# Altium PCB PiModulos V2.PcbDoc
Units mil, origin at the board's own origin, x right, y up, seen from the top; angles counter-clockwise.
Board outline 2605 x 1245 mil, 2 copper layers (Top Layer, Bottom Layer); 57 components, 38 nets, 130 pads, 0 vias.
Unrouted connection lines stored in the file: 90.
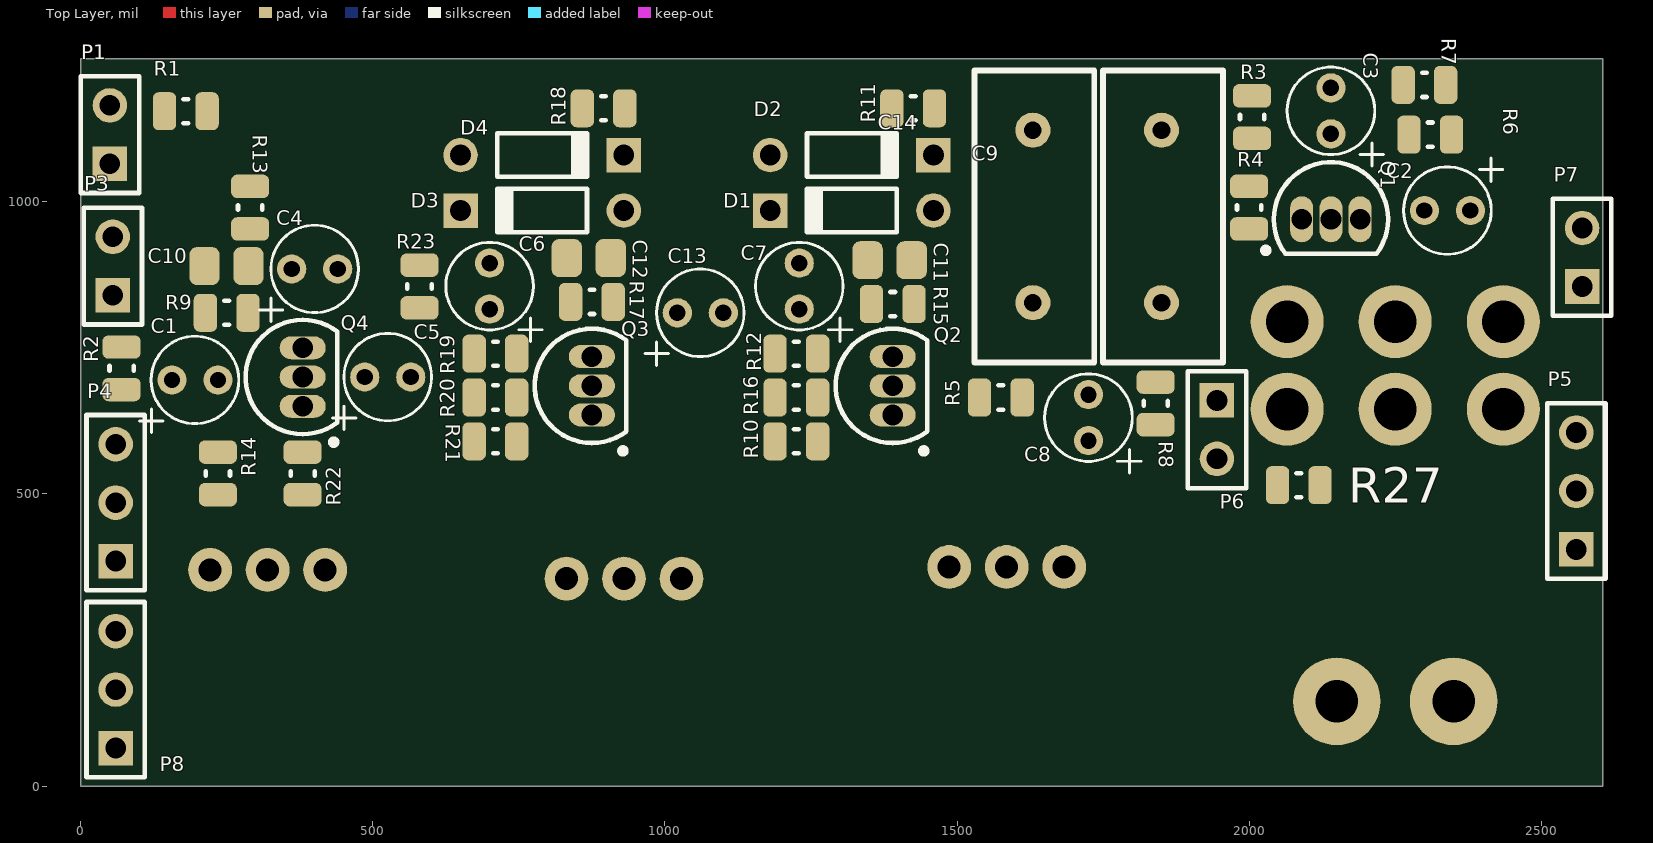
[diagram p0: Top Layer view]
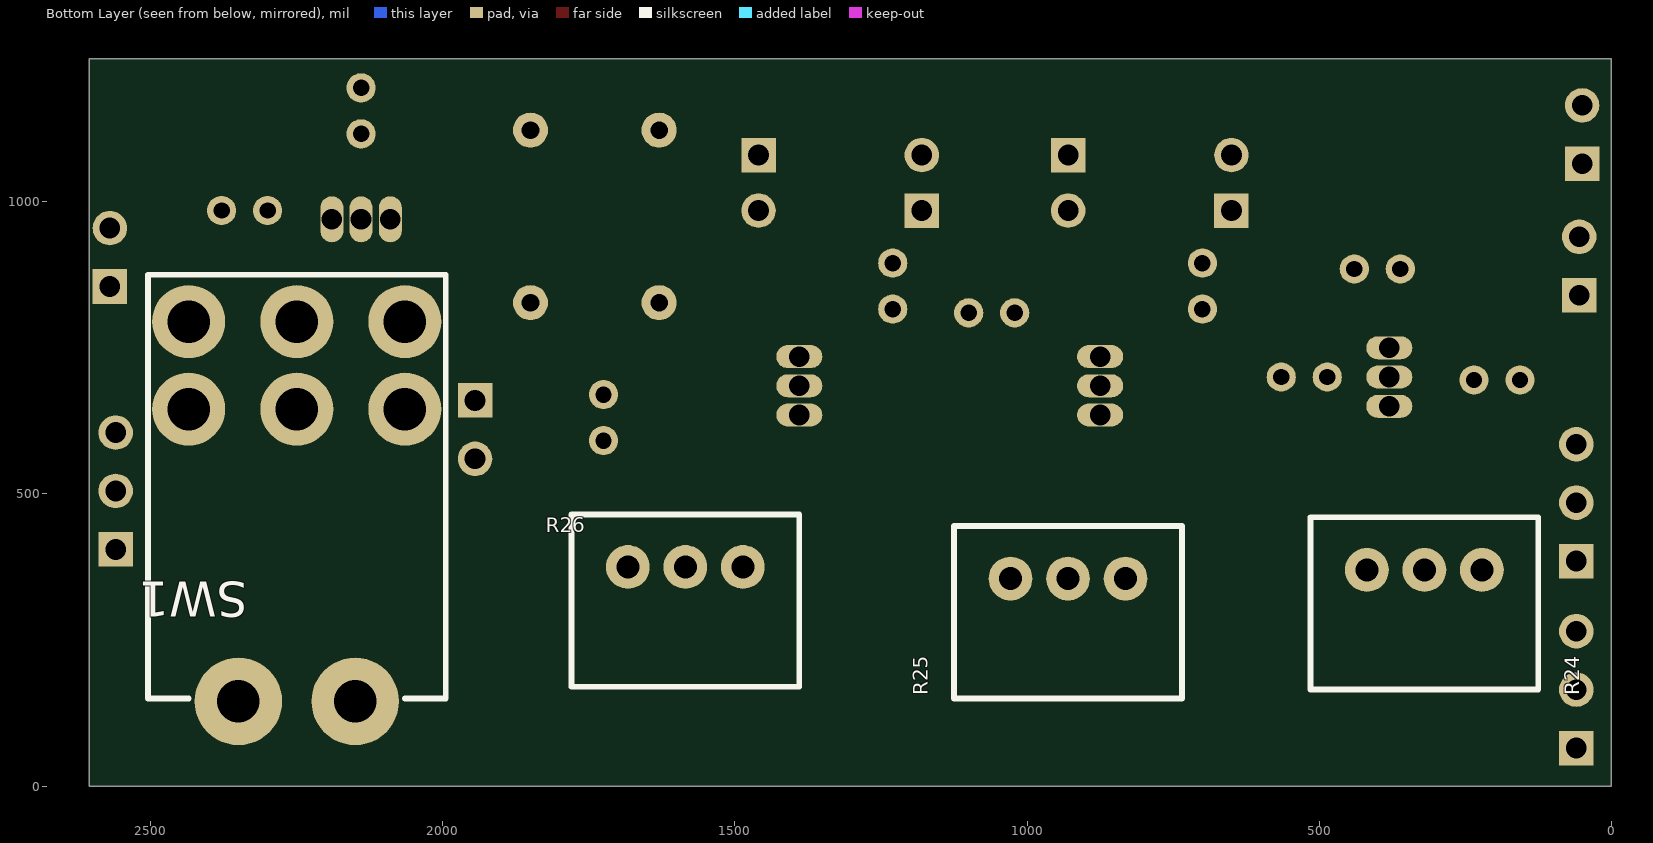
[diagram p1: Bottom Layer view, seen from below]

## Layer stack, top to bottom
Top Solder: solder mask 0.4, Solder Resist, Dk 3.5
Top Layer: signal copper 1.4
Dielectric 1: dielectric 12.6, FR-4, Dk 4.8
Bottom Layer: signal copper 1.4
Bottom Solder: solder mask 0.4, Solder Resist, Dk 3.5

## Board outline
0,0 2605,0 2605,1245 0,1245

## Design rules (kind name [scope] priority, off if disabled: settings)
Clearance [All] p1: gap=10
Height [All] p1: minheight=0 maxheight=6000 prefheight=500
PolygonConnect [All] p1: connectstyle=Relief reliefconductorwidth=10 reliefentries=4 polygonreliefangle="90 Angle" airgapwidth=10
RoutingVias [All] p1: holewidth=28 width=50 viastyle="Through Hole" minholewidth=28 minwidth=50 maxholewidth=28 maxwidth=50
SolderMaskExpansion [All] p1: expansion=4
Width [All] p1: maxlimit=10 minlimit=10 preferedwidth=10
29 further rules are at their usual default settings.

## Components (designator, comment, footprint, x,y, rotation, side; value= is the part's Value field where it differs from the comment)
C1 "0.1uF" 5X12.5mmCAP 235,695 r180 top
C2 "0.1uF" 5X12.5mmCAP 2300,985 r0 top
C3 "0.1uF" 5X12.5mmCAP 2140,1195 r270 top
C4 "0.1uF" 5X12.5mmCAP 440,885 r180 top
C5 "0.1uF" 5X12.5mmCAP 565,700 r180 top
C6 "0.1uF" 5X12.5mmCAP 700,895 r270 top
C7 "0.1uF" 5X12.5mmCAP 1230,895 r270 top
C8 "0.1uF" 5X12.5mmCAP 1725,670 r270 top
C9 "4700pF" VY2472M49Y5US63V7 1850,975 r90 top
C10 "560pF" C0805 250,890 r180 top
C11 "560pF" C0805 1385,900 r180 top
C12 "560pF" C0805 870,903.58 r180 top
C13 "0.1uF" 5X12.5mmCAP 1100,810 r180 top
C14 "4700pF" VY2472M49Y5US63V7 1630,975 r90 top
D1 "1N914BTR" DO-35 1320,985 r180 top
D2 "1N914BTR" DO-35 1320,1080 r0 top
D3 "1N914BTR" DO-35 790,985 r180 top
D4 "1N914BTR" DO-35 790,1080 r0 top
P1 "Header 2" HDR1X2 50,1065 r90 top
P3 "Header 2" HDR1X2 55,840 r90 top
P4 "Header 3" HDR1X3 60,385 r90 top
P5 "Header 3" HDR1X3 2560,405 r90 top
P6 "Header 2" HDR1X2 1945,660 r270 top
P7 "Header 2" HDR1X2 2570,855 r90 top
P8 "Header 3" HDR1X3 60,65 r90 top
Q1 "2N3904" TO-92A 2140,970 r270 top
Q2 "2N3904" TO-92A 1390,685 r0 top
Q3 "2N3904" TO-92A 875,685 r0 top
Q4 "2N3904" TO-92A 380,700 r0 top
R1 "1.2K" R0805 180,1155 r0 top
R2 "33K" R0805 70,715 r270 top
R3 "100K" R0805 2005,1145 r270 top
R4 "2.7K" R0805 2000,990 r90 top
R5 "33K" R0805 1575,665 r180 top
R6 "10K" R0805 2310,1115 r0 top
R7 "390K" R0805 2300,1200 r0 top
R8 "33K" R0805 1840,655 r90 top
R9 "470K" R0805 250,810 r180 top
R10 "100r" R0805 1225,590 r0 top
R11 "18K" R0805 1425,1160 r0 top
R12 "8.2K" R0805 1225,740 r180 top
R13 "18K" R0805 290,990 r270 top
R14 "100K" R0805 235,535 r90 top
R15 "470K" R0805 1390,825 r180 top
R16 "100K" R0805 1225,665 r0 top
R17 "470K" R0805 875,828.58 r180 top
R18 "10K" R0805 895,1160 r180 top
R19 "8.2K" R0805 710,740 r180 top
R20 "100K" R0805 710,665 r0 top
R21 "100r" R0805 710,590 r0 top
R22 "100r" R0805 380,535 r90 top
R23 "1.2K" R0805 580,855 r90 top
R24 "100K" BOURNS_PTD90SERIES_POT 320,370 r0 bottom
R25 "100K" BOURNS_PTD90SERIES_POT 930,355 r0 bottom
R26 "100K" BOURNS_PTD90SERIES_POT 1585,375 r0 bottom
R27 "150K" R0805 2085,515 r180 top
SW1 "100DP1T2B4M6QE" 100DP1T2B4M6QE 2250,645 r0 bottom

## Footprints (in the part's own frame and the unit in brackets; to place one, negate y for a bottom-side part, rotate by r counter-clockwise, add the part's x,y. Pads: shape width x height; smd on the part's side, far side on the other; paste and mask are expansions set on the pad)
5X12.5mmCAP [mil]
  round 50 hole 28: 1(0,0) 2(78.74,0)
  silkscreen extent -36,-75 134,90, body extent -35,-75 115,75, height 492
100DP1T2B4M6QE [mm] "100DP1T2B4M6QE DPDT Toggle Switch"
  round 3.81 hole 1.85: 0(-2.54,12.7) 0(2.54,12.7)
  round 3.175 hole 1.85: 1(-4.7,0) 2(0,0) 3(4.7,0) 4(-4.7,-3.81) 5(0,-3.81) 6(4.7,-3.81)
  silkscreen extent -6.48,-5.84 6.48,12.57, body extent -6.35,-4.44 6.35,26.83, height 11.56
BOURNS_PTD90SERIES_POT [mm] "Bourns Inc PTD90 Series Potentiometers, throughhole right angle PCB MOunted"
  round 1.905 hole 1: 1(-2.5,0) 2(0,0) 3(2.5,0)
  silkscreen extent -4.95,-2.29 4.95,5.21, body extent -4.8,-2.13 4.8,20.02, height 11.2
C0805 [mil]
  rrect50% 52x65 smd: 1(-37.4,0) 2(38,0)
  body extent -40,-30 40,30, height 35
DO-35 [mm] "Diode, Axial; Body 3.8 x 1.9 mm (LxDia. max), Lead Dia. 0.53 mm (max)"
  round 1.5 hole 0.9: 1(-3.55,0)
  rect 1.5x1.5 hole 0.9: 2(3.55,0)
  silkscreen extent -1.95,-0.95 2.05,0.95
HDR1X2 [mm] "Connector; Header; 2 Position"
  rect 1.5x1.5 hole 0.9: 1(0,0)
  round 1.5 hole 0.9: 2(2.54,0)
  silkscreen extent -1.27,-1.27 3.81,1.27
HDR1X3 [mm] "Connector; Header; 3 Position"
  rect 1.5x1.5 hole 0.9: 1(0,0)
  round 1.5 hole 0.9: 2(2.54,0) 3(5.08,0)
  silkscreen extent -1.27,-1.27 6.35,1.27
R0805 [mil]
  rrect50% 40x65 smd: 1(-36.42,0) 2(36.42,0)
  silkscreen extent -4,-21 4,21, body extent -43,-28 43,28, height 20
TO-92A [mm] "TO, Flat Index; 3 In-Line, Axial Leads; Body Dia. 4.5mm; Leads 0.51 x 0.48 mm (max)"
  oval 2x1 hole 0.9: 1(0,-1.27) 2(0,0) 3(0,1.27)
  silkscreen extent -2.48,-2.95 1.5,2.48, body extent -2.48,-2.5 1.5,2.5, height 6.86
VY2472M49Y5US63V7 [mil]
  round 60 hole 30: 1(-147.64,0) 2(147.64,0)
  silkscreen extent -250,-105 250,100, body extent -246,-101 246,96, height 661

## Part data
C1 C2 C3 C4 C5 C6 C7 C8 C13: library part UFG2A0R1MDM1TD, "CAP ALUM 0.1UF 20% 100V RADIAL"
C9 C14: library part VY2472M49Y5US63V7, "4700pF ±20% 440VAC Y5U (E) Ceramic Capacitor -40°C ~ 125°C Through Hole Radial, Disc 0.492\" Dia (12.50mm)"
C10 C11 C12: library part CL21C561JBANNNC, "560pF ±5% 50V C0G, NP0 Ceramic Capacitor -55°C ~ 125°C Surface Mount, MLCC 0805 (2012 Metric) 0.079\" L x 0.049\" W (2.00mm x 1.25mm"
D1 D2 D3 D4: "DIODE GEN PURP 100V 200MA DO35"
P1 P3 P6 P7: "Header, 2-Pin"
P4 P5 P8: "Header, 3-Pin"
Q1 Q2 Q3 Q4: library part 2N3904TF, "TRANS NPN 40V 0.2A TO-92"
R1 R23: library part ERJ-6ENF1201V, "RES SMD 1.2K OHM 1% 1/8W 0805"
R2 R5 R8: library part ERJ-6ENF3302V, "RES SMD 33K OHM 1% 1/8W 0805"
R3 R14 R16 R20: library part ERJ-6ENF1003V, "RES SMD 100K OHM 1% 1/8W 0805"
R4: library part RC2012F272CS, "RES SMD 2.7K OHM 1% 1/8W 0805"
R6 R18: library part ERJ-6ENF1002V, "RES SMD 10K OHM 1% 1/8W 0805"
R7: library part ERJ-6ENF3903V, "RES SMD 390K OHM 1% 1/8W 0805"
R9 R15 R17: library part ERJ-6ENF4703V, "RES SMD 470K OHM 1% 1/8W 0805"
R10 R21 R22: library part CRCW0805100RFKEA, "RES SMD 100 OHM 1% 1/8W 0805"
R11 R13: library part ERJ-6ENF1802V, "RES SMD 18K OHM 1% 1/8W 0805"
R12 R19: library part RC2012F822CS, "RES SMD 8.2K OHM 1% 1/8W 0805"
R24 R25 R26: library part PTD901-2015K-B104, "POT 100K OHM 1/20W CARBON LINEAR"
R27: library part RC2012F154CS, "RES SMD 150K OHM 1% 1/8W 0805"
SW1: "SWITCH TOGGLE DPDT 5A 120V"

## Nets (pads, with @x,y where several pads share a name; then routed paths per layer and width w, separated by ;. In a path a pad name is that pad's centre, name@x,y a point inside that pad or via, vN(x,y) a via of type N, cw(c..) or ccw(c..) an arc to the next point about the centre after c; other vN are vias at no path point)
9VCC: P3.2 R1.1 R6.2 R7.2 R11.1 R13.1 R18.2
GND: C8.2 P1.1 P7.2 P8.1 R3.1 R4.1 R5.2 R10.1 R14.1 R16.1 R20.1 R21.1 R22.1 R23.2 R26.3
NetC1_1: C1.1 C10.2 Q4.2 R9.2 R14.2
NetC1_2: C1.2 R2.1
NetC2_1: C2.1 Q1.3 R6.1
NetC2_2: C2.2 R26.1
NetC3_1: C3.1 SW1.5
NetC3_2: C3.2 Q1.2 R3.2 R7.1
NetC4_1: C4.1 R24.1
NetC4_2: C4.2 C10.1 Q4.3 R9.1 R13.2
NetC5_1: C5.1 R19.2
NetC5_2: C5.2 R24.2
NetC6_1: C6.1 D3.2 D4.1
NetC6_2: C6.2 C12.2 Q3.2 R17.2 R19.1 R20.2
NetC7_1: C7.1 D1.2 D2.1
NetC7_2: C7.2 C11.2 Q2.2 R12.1 R15.2 R16.2
NetC8_1: C8.1 R8.1 R25.3
NetC9_1: C9.1 P6.1 R5.1 R25.1
NetC9_2: C9.2 C14.2 R8.2 SW1.3
NetC11_1: C11.1 D1.1 D2.2 Q2.3 R11.2 R15.1 SW1.2
NetC12_1: C12.1 C13.2 D3.1 D4.2 Q3.3 R17.1 R18.1
NetC13_1: C13.1 R12.2
NetC14_1: C14.1 P6.2
NetP1_2: P1.2 R1.2
NetP3_1: P3.1 P8.3
NetP4_1: P4.1 P5.3
NetP4_2: P4.2 P8.2
NetP4_3: P4.3 R2.2
NetP5_1: P5.1 R26.2
NetP5_2: P5.2 P7.1
NetQ1_1: Q1.1 R4.2
NetQ2_1: Q2.1 R10.2
NetQ3_1: Q3.1 R21.2
NetQ4_1: Q4.1 R22.2
NetR23_1: R23.1 R24.3
NetR25_2: R25.2 SW1.4
NetR27_1: R27.1 SW1.6
NetR27_2: R27.2 SW1.1
pads on no net: SW1.0

## Silkscreen, mask and mechanical layers (free items; w line width, h text height)
Mechanical 15:
  the board outline again, w10